# EAGLE board DMXpanelized (EAGLE 5.10)
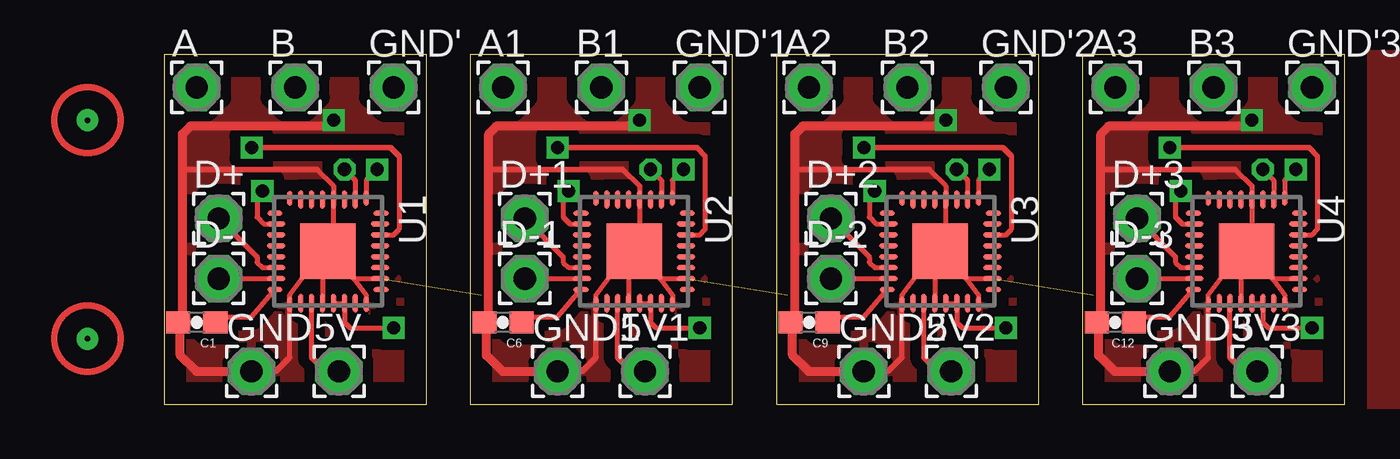
[diagram p0: board, top side]
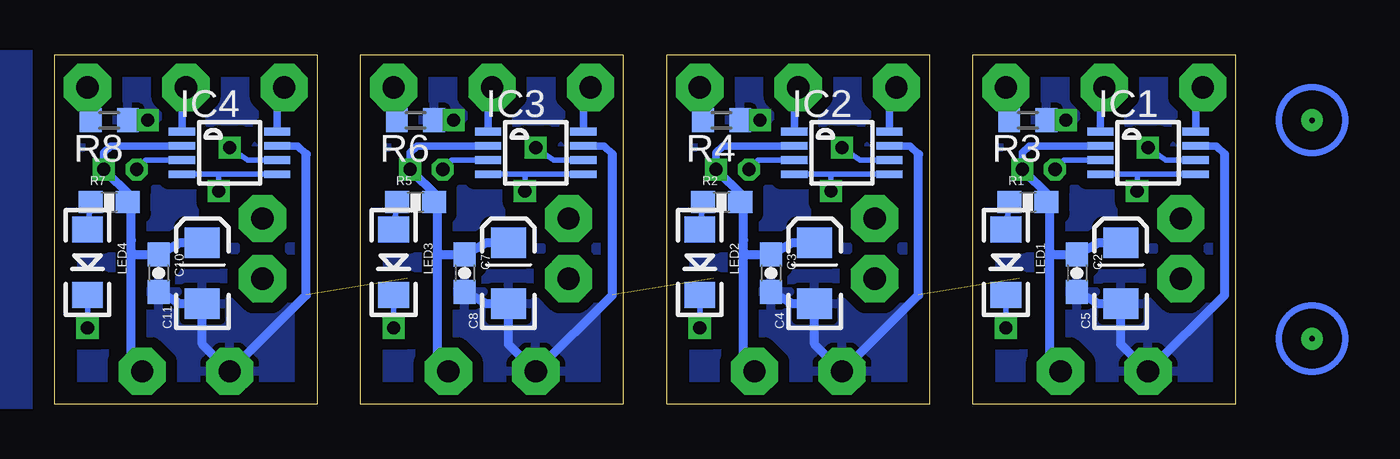
[diagram p1: board, bottom side, seen from below]

Size 54 x 16 mm. Coordinates in mm from the lower left corner, seen from the top.
Outline: 0,0 12,0 12,16 0,16 0,0
Outline: 14,0 26,0 26,16 14,16 14,0
Outline: 28,0 40,0 40,16 28,16 28,0
Outline: 42,0 54,0 54,16 42,16 42,0
Copper layers (1*16): Top 0.035mm / dielectric 1.5mm / Bottom 0.035mm
Design rules "default": minimum track width 10mil, minimum drill 24mil, track to track 8mil, track to pad 8mil, pad to pad 8mil, via to via 8mil, smd to smd 8mil, copper to edge 40mil, drill to drill 8mil, minimum pad ring 10mil, minimum via ring 8mil, stop-mask expansion 4mil, vias tented up to drill 0mil, thermal gap 10mil
Net classes: 0 default: width 0.203 mm; 1 power: width 0.254 mm

## Footprints (pad centres in the part's own frame; a part is rotated, then mirrored left to right if it is on the bottom)
2,15/1,0 = drill 1.016 pad 2.159 octagon: 1 0,0
0603-CAP = smd 1.1 x 1: 1 -0.85,0; 2 0.85,0
EIA3216 = smd 1.4 x 1.6: A 1.4,0; C -1.4,0
MARKER = drill 0.254 pad 1 round: P$1 0,0
MAXIM_UMAX8 = smd 0.35 x 1.2: 1 -0.975,-2.175; 2 -0.325,-2.175; 3 0.325,-2.175; 4 0.975,-2.175; 5 0.975,2.175; 6 0.325,2.175; 7 -0.325,2.175; 8 -0.975,2.175
LED-1206 = smd 1.2 x 1.4: A -1.5,0; C 1.5,0
0603-RES = smd 1.1 x 1: 1 -0.85,0; 2 0.85,0
R0603 = smd 1 x 1.1: 1 -0.85,0; 2 0.85,0
JOCKI_RHB_S-PQFP-N32 = smd 0.7 x 0.229: 1 -2.425,1.75; 8 -2.425,-1.75; 17 2.425,-1.75; 24 2.425,1.75 | smd 0.85 x 0.229: 2 -2.375,1.25; 3 -2.375,0.75; 4 -2.375,0.25; 5 -2.375,-0.25; 6 -2.375,-0.75; 7 -2.375,-1.25; 18 2.375,-1.25; 19 2.375,-0.75; 20 2.375,-0.25; 21 2.375,0.25; 22 2.375,0.75; 23 2.375,1.25 | smd 0.229 x 0.7: 9 -1.75,-2.425; 16 1.75,-2.425; 25 1.75,2.425; 32 -1.75,2.425 | smd 0.229 x 0.85: 10 -1.25,-2.375; 11 -0.75,-2.375; 12 -0.25,-2.375; 13 0.25,-2.375; 14 0.75,-2.375; 15 1.25,-2.375; 26 1.25,2.375; 27 0.75,2.375; 28 0.25,2.375; 29 -0.25,2.375; 30 -0.75,2.375; 31 -1.25,2.375 | smd 2.54 x 2.54: EXP 0,0

## Placement (x,y rotation side)
5V  WIREPAD2,15/1,0  [2,15/1,0]  8,1.5 0 top
5V1  WIREPAD2,15/1,0  [2,15/1,0]  22,1.5 0 top
5V2  WIREPAD2,15/1,0  [2,15/1,0]  36,1.5 0 top
5V3  WIREPAD2,15/1,0  [2,15/1,0]  50,1.5 0 top
A  WIREPAD2,15/1,0  [2,15/1,0]  1.5,14.5 0 top
A1  WIREPAD2,15/1,0  [2,15/1,0]  15.5,14.5 0 top
A2  WIREPAD2,15/1,0  [2,15/1,0]  29.5,14.5 0 top
A3  WIREPAD2,15/1,0  [2,15/1,0]  43.5,14.5 0 top
B  WIREPAD2,15/1,0  [2,15/1,0]  6,14.5 0 top
B1  WIREPAD2,15/1,0  [2,15/1,0]  20,14.5 0 top
B2  WIREPAD2,15/1,0  [2,15/1,0]  34,14.5 0 top
B3  WIREPAD2,15/1,0  [2,15/1,0]  48,14.5 0 top
C1  0.1uF  [0603-CAP]  1.5,3.75 180 top
C2  0.1uF  [0603-CAP]  7.25,6 270 bottom
C3  0.1uF  [0603-CAP]  21.25,6 270 bottom
C4  10uF  [EIA3216]  19.25,6 90 bottom
C5  10uF  [EIA3216]  5.25,6 90 bottom
C6  0.1uF  [0603-CAP]  15.5,3.75 180 top
C7  0.1uF  [0603-CAP]  35.25,6 270 bottom
C8  10uF  [EIA3216]  33.25,6 90 bottom
C9  0.1uF  [0603-CAP]  29.5,3.75 180 top
C10  0.1uF  [0603-CAP]  49.25,6 270 bottom
C11  10uF  [EIA3216]  47.25,6 90 bottom
C12  0.1uF  [0603-CAP]  43.5,3.75 180 top
D+  WIREPAD2,15/1,0  [2,15/1,0]  2.5,8.5 0 top
D+1  WIREPAD2,15/1,0  [2,15/1,0]  16.5,8.5 0 top
D+2  WIREPAD2,15/1,0  [2,15/1,0]  30.5,8.5 0 top
D+3  WIREPAD2,15/1,0  [2,15/1,0]  44.5,8.5 0 top
D-  WIREPAD2,15/1,0  [2,15/1,0]  2.5,5.75 0 top
D-1  WIREPAD2,15/1,0  [2,15/1,0]  16.5,5.75 0 top
D-2  WIREPAD2,15/1,0  [2,15/1,0]  30.5,5.75 0 top
D-3  WIREPAD2,15/1,0  [2,15/1,0]  44.5,5.75 0 top
E$1  [MARKER]  -3.5,3 0 top  (outside the outline)
E$2  [MARKER]  -3.5,13 0 top  (outside the outline)
E$3  [MARKER]  63.5,3 0 top  (outside the outline)
E$4  [MARKER]  63.5,13 0 top  (outside the outline)
GND  WIREPAD2,15/1,0  [2,15/1,0]  4,1.5 0 top
GND1  WIREPAD2,15/1,0  [2,15/1,0]  18,1.5 0 top
GND2  WIREPAD2,15/1,0  [2,15/1,0]  32,1.5 0 top
GND3  WIREPAD2,15/1,0  [2,15/1,0]  46,1.5 0 top
GND'  WIREPAD2,15/1,0  [2,15/1,0]  10.5,14.5 0 top
GND'1  WIREPAD2,15/1,0  [2,15/1,0]  24.5,14.5 0 top
GND'2  WIREPAD2,15/1,0  [2,15/1,0]  38.5,14.5 0 top
GND'3  WIREPAD2,15/1,0  [2,15/1,0]  52.5,14.5 0 top
IC1  MAXIM_MAX481CUA  [MAXIM_UMAX8]  4,11.5 270 bottom
IC2  MAXIM_MAX481CUA  [MAXIM_UMAX8]  18,11.5 270 bottom
IC3  MAXIM_MAX481CUA  [MAXIM_UMAX8]  32,11.5 270 bottom
IC4  MAXIM_MAX481CUA  [MAXIM_UMAX8]  46,11.5 270 bottom
LED1  Red  [LED-1206]  10.5,6.5 270 bottom
LED2  Red  [LED-1206]  24.5,6.5 270 bottom
LED3  Red  [LED-1206]  38.5,6.5 270 bottom
LED4  Red  [LED-1206]  52.5,6.5 270 bottom
R1  1K  [0603-RES]  9.5,9.25 0 bottom
R2  1K  [0603-RES]  23.5,9.25 0 bottom
R3  10k  [R0603]  9.5,13 180 bottom
R4  10k  [R0603]  23.5,13 180 bottom
R5  1K  [0603-RES]  37.5,9.25 0 bottom
R6  10k  [R0603]  37.5,13 180 bottom
R7  1K  [0603-RES]  51.5,9.25 0 bottom
R8  10k  [R0603]  51.5,13 180 bottom
U1  JOCKI_FT232RLQFN  [JOCKI_RHB_S-PQFP-N32]  7.5,7 270 top
U2  JOCKI_FT232RLQFN  [JOCKI_RHB_S-PQFP-N32]  21.5,7 270 top
U3  JOCKI_FT232RLQFN  [JOCKI_RHB_S-PQFP-N32]  35.5,7 270 top
U4  JOCKI_FT232RLQFN  [JOCKI_RHB_S-PQFP-N32]  49.5,7 270 top

## Library data of the parts
5V 5V1-5V3 A A1-A3 B B1-B3 D+ D+1-D+3 D- D-1-D-3 GND GND1-GND3 GND' GND'1-GND'3 = wirepad
C1-C12 LED1-LED4 R1 R2 R5 R7 = SparkFun
E$1-E$4 = jocki
IC1-IC4 U1-U4 = DMX
R3 R4 R6 R8 = rcl

## Nets
3.3V [power]: C1.1 U1.16
3.3V1 [power]: C6.1 U2.16
3.3V2 [power]: C9.1 U3.16
3.3V3 [power]: C12.1 U4.16
5V: 5V.1 C2.1 C5.A IC1.2 R1.2 U1.1 U1.19
5V1: 5V1.1 C3.1 C4.A IC2.2 R2.2 U2.1 U2.19
5V2: 5V2.1 C7.1 C8.A IC3.2 R5.2 U3.1 U3.19
5V3: 5V3.1 C10.1 C11.A IC4.2 R7.2 U4.1 U4.19
CTS: U1.8
CTS1: U2.8
CTS2: U3.8
CTS3: U4.8
DTR: U1.31
DTR1: U2.31
DTR2: U3.31
DTR3: U4.31
GND [power]: C1.2 C2.2 C3.2 C4.C C5.C C6.2 C7.2 C8.C C9.2 C10.2 C11.C C12.2 GND1.1 GND2.1 GND3.1 GND.1 IC1.7 IC2.7 IC3.7 IC4.7 R3.1 R4.1 R6.1 R8.1 U1.4 U1.17 U1.20 U1.24 U1.26 U2.4 U2.17 U2.20 U2.24 U2.26 U3.4 U3.17 U3.20 U3.24 U3.26 U4.4 U4.17 U4.20 U4.24 U4.26
N$1: LED1.A R1.1
N$2: LED2.A R2.1
N$3: B.1 IC1.1
N$4: A.1 IC1.8
N$5: GND'.1 R3.2
N$6: B1.1 IC2.1
N$7: A1.1 IC2.8
N$8: GND'1.1 R4.2
N$9: LED3.A R5.1
N$10: B2.1 IC3.1
N$11: A2.1 IC3.8
N$12: GND'2.1 R6.2
N$13: LED4.A R7.1
N$14: B3.1 IC4.1
N$15: A3.1 IC4.8
N$16: GND'3.1 R8.2
RXI: IC1.3 U1.2
RXI1: IC2.3 U2.2
RXI2: IC3.3 U3.2
RXI3: IC4.3 U4.2
TXDEN: IC1.4 IC1.5 U1.10
TXDEN1: IC2.4 IC2.5 U2.10
TXDEN2: IC3.4 IC3.5 U3.10
TXDEN3: IC4.4 IC4.5 U4.10
TXLED: LED1.C U1.21 U1.22
TXLED1: LED2.C U2.21 U2.22
TXLED2: LED3.C U3.21 U3.22
TXLED3: LED4.C U4.21 U4.22
TXO: IC1.6 U1.30
TXO1: IC2.6 U2.30
TXO2: IC3.6 U3.30
TXO3: IC4.6 U4.30
USB_D+: D+.1 U1.14
USB_D+1: D+1.1 U2.14
USB_D+2: D+2.1 U3.14
USB_D+3: D+3.1 U4.14
USB_D-: D-.1 U1.15
USB_D-1: D-1.1 U2.15
USB_D-2: D-2.1 U3.15
USB_D-3: D-3.1 U4.15

## Tracks (layer width: path | path; a pad name or v marks a point on that pad's centre or on a via)
3.3V
  Top 0.229: 2.25,4 4,4 U1.16
  Top 0.254: C1.1 2.15,3.9 2.25,4
3.3V1
  Top 0.229: 16.25,4 18,4 U2.16
  Top 0.254: C6.1 16.15,3.9 16.25,4
3.3V2
  Top 0.229: 30.25,4 32,4 U3.16
  Top 0.254: C9.1 30.15,3.9 30.25,4
3.3V3
  Top 0.229: 44.25,4 46,4 U4.16
  Top 0.254: C12.1 44.15,3.9 44.25,4
5V  (via drill 0.6)
  Top 0.229: 6.75,2.13 U1.19 | U1.1 9.25,10.25 v9.75,10.75
  Top 0.254: 6.75,2.13 7.38,1.5 5V.1
  Bottom 0.254: 8.5,9.5 R1.2
  Bottom 0.35: IC1.2 9.43,11.82 9.75,11.51 v9.75,10.75
  Bottom 0.406: 5V.1 8.5,2 8.5,7 | 8.5,7 8.5,7.5 8.5,9.5 v9.75,10.75 | C5.A 6.25,7.4 C2.1 8.35,6.85 8.5,7
5V1  (via drill 0.6)
  Top 0.229: 20.75,2.13 U2.19 | U2.1 23.25,10.25 v23.75,10.75
  Top 0.254: 20.75,2.13 21.39,1.5 5V1.1
  Bottom 0.254: 22.5,9.5 R2.2
  Bottom 0.35: IC2.2 23.43,11.82 23.75,11.51 v23.75,10.75
  Bottom 0.406: 5V1.1 22.5,2 22.5,7 | 22.5,7 22.5,7.5 22.5,9.5 v23.75,10.75 | C4.A 20.25,7.4 C3.1 22.35,6.85 22.5,7
5V2  (via drill 0.6)
  Top 0.229: 34.75,2.13 U3.19 | U3.1 37.25,10.25 v37.75,10.75
  Top 0.254: 34.75,2.13 35.38,1.5 5V2.1
  Bottom 0.254: 36.5,9.5 R5.2
  Bottom 0.35: IC3.2 37.43,11.82 37.75,11.51 v37.75,10.75
  Bottom 0.406: 5V2.1 36.5,2 36.5,7 | 36.5,7 36.5,7.5 36.5,9.5 v37.75,10.75 | C8.A 34.25,7.4 C7.1 36.35,6.85 36.5,7
5V3  (via drill 0.6)
  Top 0.229: 48.75,2.13 U4.19 | U4.1 51.25,10.25 v51.75,10.75
  Top 0.254: 48.75,2.13 49.38,1.5 5V3.1
  Bottom 0.254: 50.5,9.5 R7.2
  Bottom 0.35: IC4.2 51.43,11.82 51.75,11.51 v51.75,10.75
  Bottom 0.406: 5V3.1 50.5,2 50.5,7 | 50.5,7 50.5,7.5 50.5,9.5 v51.75,10.75 | C11.A 48.25,7.4 C10.1 50.35,6.85 50.5,7
GND  (via drill 0.6)  (3 unrouted)
  Top 0.229: 6.5,6 5.75,5 U1.17 5.75,2.13 | 7.25,6 U1.20 | U1.24 9.25,5 8.68,5.76 U1.26 | 7,10.75 7.75,10 U1.4 7.75,6 | 20.5,6 19.75,5 U2.17 19.75,2.13 | 21.25,6 U2.20 | U2.24 23.25,5 22.68,5.76 U2.26 | 21,10.75 21.75,10 U2.4 21.75,6 | 34.5,6 33.75,5 U3.17 33.75,2.13 | 35.25,6 U3.20 | U3.24 37.25,5 36.68,5.76 U3.26 | 35,10.75 35.75,10 U3.4 35.75,6 | 48.5,6 47.75,5 U4.17 47.75,2.13 | 49.25,6 U4.20 | U4.24 51.25,5 50.68,5.76 U4.26 | 49,10.75 49.75,10 U4.4 49.75,6
  Top 0.254: 6.5,6 7.25,6 7.75,6 8.5,6 8.68,5.76 | 5.75,2.13 5.12,1.5 GND.1 | 0.85,10.75 7,10.75 | 20.5,6 21.25,6 21.75,6 22.5,6 22.68,5.76 | 19.75,2.13 19.11,1.5 GND1.1 | 14.85,10.75 21,10.75 | 34.5,6 35.25,6 35.75,6 36.5,6 36.68,5.76 | 33.75,2.13 33.12,1.5 GND2.1 | 28.85,10.75 35,10.75 | 48.5,6 49.25,6 49.75,6 50.5,6 50.68,5.76 | 47.75,2.13 47.12,1.5 GND3.1 | 42.85,10.75 49,10.75
  Top 0.406: GND.1 1.49,1.5 0.75,2.23 0.75,3.5 C1.2 0.75,3.75 0.85,4 0.85,10.75 0.85,12.37 1.24,12.75 7.5,12.75 v7.75,13 | GND1.1 15.48,1.5 14.75,2.23 14.75,3.5 C6.2 14.75,3.75 14.85,4 14.85,10.75 14.85,12.37 15.23,12.75 21.5,12.75 v21.75,13 | GND2.1 29.48,1.5 28.75,2.23 28.75,3.5 C9.2 28.75,3.75 28.85,4 28.85,10.75 28.85,12.37 29.23,12.75 35.5,12.75 v35.75,13 | GND3.1 43.48,1.5 42.75,2.23 42.75,3.5 C12.2 42.75,3.75 42.85,4 42.85,10.75 42.85,12.37 43.23,12.75 49.5,12.75 v49.75,13
  Bottom 0.35: IC1.7 0.88,11.82 0.5,11.44 | IC2.7 14.89,11.82 14.5,11.44 | IC3.7 28.88,11.82 28.5,11.44 | IC4.7 42.88,11.82 42.5,11.44
  Bottom 0.406: 0.5,11.44 0.5,5 GND.1 5.25,2.75 C5.C 6.25,4.6 C2.2 | v7.75,13 R3.1 | 14.5,11.44 14.5,5 GND1.1 19.25,2.75 C4.C 20.25,4.6 C3.2 | v21.75,13 R4.1 | 28.5,11.44 28.5,5 GND2.1 33.25,2.75 C8.C 34.25,4.6 C7.2 | v35.75,13 R6.1 | 42.5,11.44 42.5,5 GND3.1 47.25,2.75 C11.C 48.25,4.6 C10.2 | v49.75,13 R8.1
  pour Bottom (isolate 0.5): -1,16 61,16 61,0 -1,0
  pour Top (isolate 0.5): -1,0 61,0 61,16 -1,16
N$1
  Bottom 0.254: R1.1 LED1.A
N$2
  Bottom 0.254: R2.1 LED2.A
N$3
  Bottom 0.35: IC1.1 6.18,14.32 B.1
N$4
  Bottom 0.35: IC1.8 1.83,14.18 A.1
N$5
  Bottom 0.254: R3.2 GND'.1
N$6
  Bottom 0.35: IC2.1 20.18,14.32 B1.1
N$7
  Bottom 0.35: IC2.8 15.82,14.18 A1.1
N$8
  Bottom 0.254: R4.2 GND'1.1
N$9
  Bottom 0.254: R5.1 LED3.A
N$10
  Bottom 0.35: IC3.1 34.17,14.32 B2.1
N$11
  Bottom 0.35: IC3.8 29.83,14.18 A2.1
N$12
  Bottom 0.254: R6.2 GND'2.1
N$13
  Bottom 0.254: R7.1 LED4.A
N$14
  Bottom 0.35: IC4.1 48.17,14.32 B3.1
N$15
  Bottom 0.35: IC4.8 43.83,14.18 A3.1
N$16
  Bottom 0.254: R8.2 GND'3.1
RXI  (via drill 0.6)
  Top 0.229: U1.2 8.75,10.25 v8.25,10.75
  Bottom 0.254: v8.25,10.75 7.82,11.18 IC1.3
RXI1  (via drill 0.6)
  Top 0.229: U2.2 22.75,10.25 v22.25,10.75
  Bottom 0.254: v22.25,10.75 21.82,11.18 IC2.3
RXI2  (via drill 0.6)
  Top 0.229: U3.2 36.75,10.25 v36.25,10.75
  Bottom 0.254: v36.25,10.75 35.83,11.18 IC3.3
RXI3  (via drill 0.6)
  Top 0.229: U4.2 50.75,10.25 v50.25,10.75
  Bottom 0.254: v50.25,10.75 49.83,11.18 IC4.3
TXDEN  (via drill 0.6)
  Top 0.229: U1.10 4.57,8.25 4.25,8.57 4.25,9.5 v4.5,9.75
  Bottom 0.254: 4.5,10.53 v4.5,9.75 | 4.5,10.53 IC1.4 | IC1.5 4.5,10.53
TXDEN1  (via drill 0.6)
  Top 0.229: U2.10 18.57,8.25 18.25,8.57 18.25,9.5 v18.5,9.75
  Bottom 0.254: 18.5,10.53 v18.5,9.75 | 18.5,10.53 IC2.4 | IC2.5 18.5,10.53
TXDEN2  (via drill 0.6)
  Top 0.229: U3.10 32.57,8.25 32.25,8.57 32.25,9.5 v32.5,9.75
  Bottom 0.254: 32.5,10.53 v32.5,9.75 | 32.5,10.53 IC3.4 | IC3.5 32.5,10.53
TXDEN3  (via drill 0.6)
  Top 0.229: U4.10 46.57,8.25 46.25,8.57 46.25,9.5 v46.5,9.75
  Bottom 0.254: 46.5,10.53 v46.5,9.75 | 46.5,10.53 IC4.4 | IC4.5 46.5,10.53
TXLED  (via drill 0.6)
  Top 0.229: U1.21 U1.22 8.25,3.75 8.5,3.5 v10.5,3.5
  Bottom 0.254: v10.5,3.5 LED1.C
TXLED1  (via drill 0.6)
  Top 0.229: U2.21 U2.22 22.25,3.75 22.5,3.5 v24.5,3.5
  Bottom 0.254: v24.5,3.5 LED2.C
TXLED2  (via drill 0.6)
  Top 0.229: U3.21 U3.22 36.25,3.75 36.5,3.5 v38.5,3.5
  Bottom 0.254: v38.5,3.5 LED3.C
TXLED3  (via drill 0.6)
  Top 0.229: U4.21 U4.22 50.25,3.75 50.5,3.5 v52.5,3.5
  Bottom 0.254: v52.5,3.5 LED4.C
TXO  (via drill 0.6)
  Top 0.229: U1.30 10.5,7.75 10.75,8 10.75,11.37
  Top 0.254: v4,11.75 10.37,11.75 10.75,11.37
  Bottom 0.254: IC1.6 3.18,11.18 v4,11.75
TXO1  (via drill 0.6)
  Top 0.229: U2.30 24.5,7.75 24.75,8 24.75,11.37
  Top 0.254: v18,11.75 24.36,11.75 24.75,11.37
  Bottom 0.254: IC2.6 17.18,11.18 v18,11.75
TXO2  (via drill 0.6)
  Top 0.229: U3.30 38.5,7.75 38.75,8 38.75,11.37
  Top 0.254: v32,11.75 38.37,11.75 38.75,11.37
  Bottom 0.254: IC3.6 31.17,11.18 v32,11.75
TXO3  (via drill 0.6)
  Top 0.229: U4.30 52.5,7.75 52.75,8 52.75,11.37
  Top 0.254: v46,11.75 52.37,11.75 52.75,11.37
  Bottom 0.254: IC4.6 45.17,11.18 v46,11.75
USB_D+
  Top 0.229: U1.14 4.5,6.25 4.25,6.5 4.25,6.75 D+.1
USB_D+1
  Top 0.229: U2.14 18.5,6.25 18.25,6.5 18.25,6.75 D+1.1
USB_D+2
  Top 0.229: U3.14 32.5,6.25 32.25,6.5 32.25,6.75 D+2.1
USB_D+3
  Top 0.229: U4.14 46.5,6.25 46.25,6.5 46.25,6.75 D+3.1
USB_D-
  Top 0.229: D-.1 U1.15
USB_D-1
  Top 0.229: D-1.1 U2.15
USB_D-2
  Top 0.229: D-2.1 U3.15
USB_D-3
  Top 0.229: D-3.1 U4.15

## Text on the board
_tNames: A | B | GND' | A | B | GND' | A | B | GND' | A | B | GND' | D+ | U1 | D+ | U1 | D+ | U1 | D+ | U1 | D- | D- | D- | D- | C1 | GND | 5V | C1 | GND | 5V | C1 | GND | 5V | C1 | GND | 5V
_bNames: IC1 | IC1 | IC1 | IC1 | R3 | R3 | R3 | R3 | R1 | R1 | R1 | R1 | C2 | LED1 | C2 | LED1 | C2 | LED1 | C2 | LED1 | C5 | C5 | C5 | C5